# EAGLE board amp_soha_v4 (EAGLE 6.4)
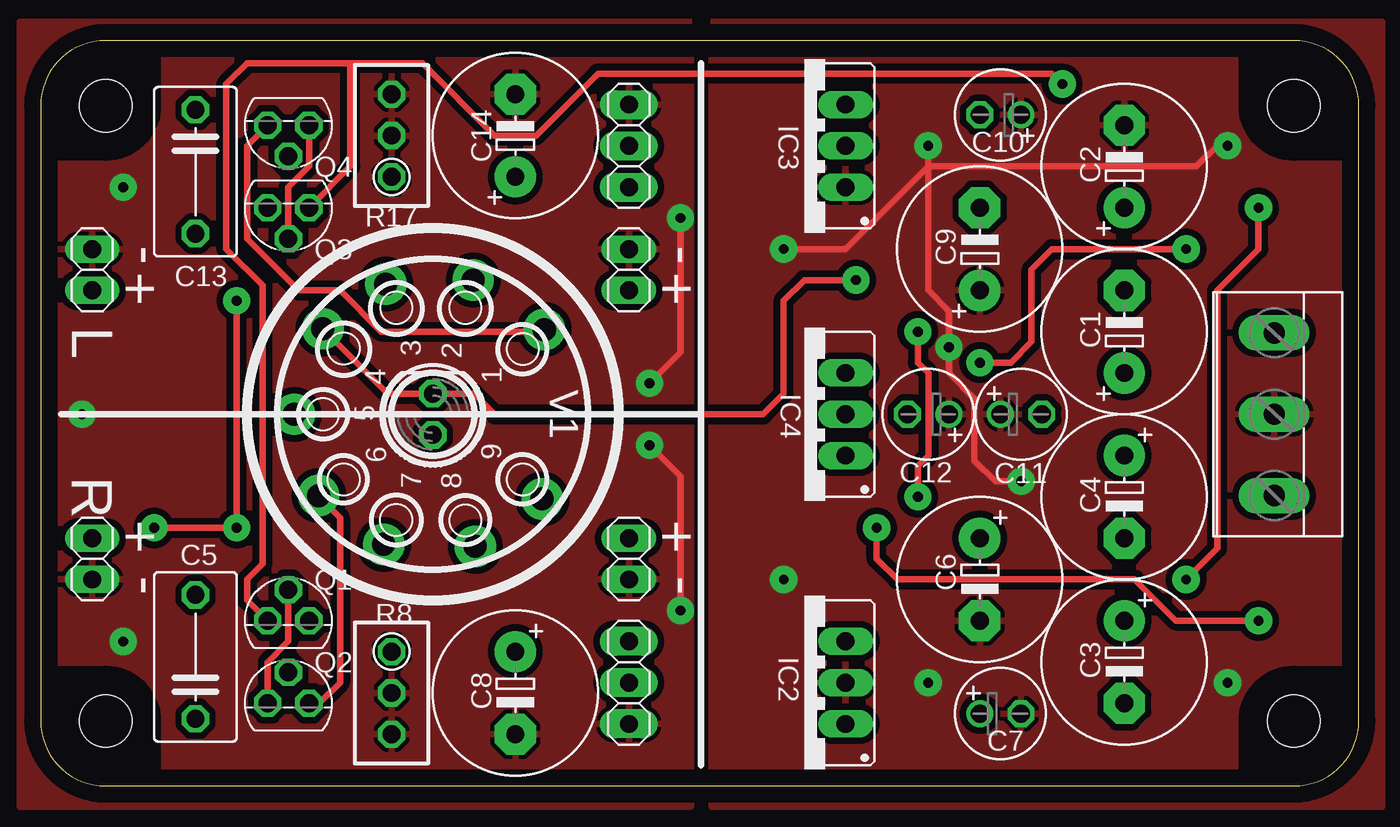
[diagram p0: board, top side]
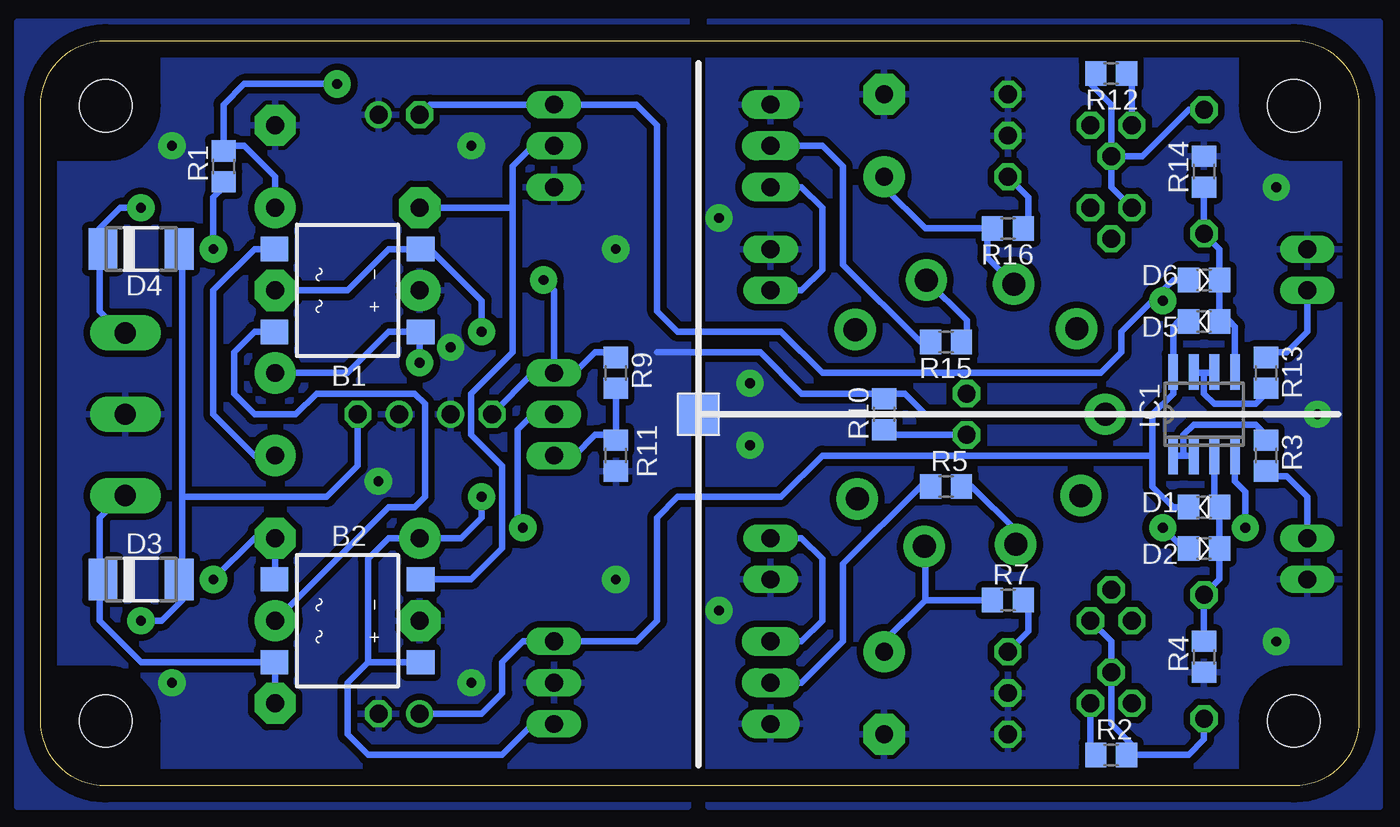
[diagram p1: board, bottom side, seen from below]

Size 81.11 x 45.84 mm. Coordinates in mm from the lower left corner, seen from the top.
Outline: 4,0 77.11,0 arc90 81.11,4 81.11,41.84 arc90 77.11,45.84 4,45.84 arc90 0,41.84 0,4 arc90 4,0
Copper layers (1*16): Top 0.035mm / dielectric 1.5mm / Bottom 0.035mm
Design rules "default": minimum track width 10mil, minimum drill 24mil, track to track 8mil, track to pad 8mil, pad to pad 8mil, via to via 8mil, smd to smd 8mil, copper to edge 40mil, drill to drill 8mil, minimum pad ring 10mil, minimum via ring 8mil, stop-mask expansion 4mil, vias tented up to drill 0mil, thermal gap 10mil
Holes 3.2 mm at 4,4 77.11,4 77.11,41.84 4,41.84
tKeepout: 8 lines
tRestrict: area 0,38.8 to 7,45.8; area 74.1,38.8 to 81.1,45.8; area 0,0 to 7,7; area 74.1,0 to 81.1,7
bRestrict: area 0,38.8 to 7,45.8; area 74.1,38.8 to 81.1,45.8; area 0,0 to 7,7; area 74.1,0 to 81.1,7
vRestrict: area 0,38.8 to 7,45.8; area 74.1,38.8 to 81.1,45.8; area 0,0 to 7,7; area 74.1,0 to 81.1,7

## Footprints (pad centres in the part's own frame; a part is rotated, then mirrored left to right if it is on the bottom)
DFS = smd 1.5 x 1.7: + -2.55,-4.5; - 2.55,-4.5; AC1 -2.55,4.5; AC2 2.55,4.5
E5-10,5 = drill 1.1 pad 2.54: + -2.54,0 | drill 1.1 pad 2.54 octagon: - 2.54,0
C075-052X106 = drill 1.1 pad 1.676 octagon: 1 -3.81,0; 2 3.81,0
E2,5-6 = drill 1.1: + -1.27,0 | drill 1.1 pad 1.6 octagon: - 1.27,0
D0805 = smd 1.3 x 1.5: A -0.95,0; K 0.95,0
DO-214AC = smd 1.778 x 2.54: A 2.342,0; C -2.342,0
SO08 = smd 0.6 x 2.2: 1 -1.905,-2.6; 2 -0.635,-2.6; 3 0.635,-2.6; 4 1.905,-2.6; 5 1.905,2.6; 6 0.635,2.6; 7 -0.635,2.6; 8 -1.905,2.6
78XXS = drill 1.1 pad 1.676 long: GND 0,-2.54; IN -2.54,-2.54; OUT 2.54,-2.54
79XXS = drill 1.1 pad 1.676 long: GND -2.54,-2.54; IN 0,-2.54; OUT 2.54,-2.54
337TS = drill 1.1 pad 1.676 long: 1 -2.54,-2.54; 2 0,-2.54; 3 2.54,-2.54
1X02 = drill 1.1 pad 1.676 long: 1 -1.27,0; 2 1.27,0
LED5MM = drill 1.1 pad 1.676 octagon: A -1.27,0; K 1.27,0
1X03 = drill 1.1 pad 1.778 long: 1 -2.54,0; 2 0,0; 3 2.54,0
TO92 = drill 1.1 pad 1.676 octagon: 1 1.27,0; 2 0,1.905; 3 -1.27,0
R0805 = smd 1.3 x 1.5: 1 -0.95,0; 2 0.95,0
SHORT = smd 1.27 x 2.54: 1 -0.635,0; 2 0.635,0
RTRIM3296W = drill 1.1 pad 1.676 octagon: 1 0,-2.54; 2 0,0; 3 0,2.54
NOVAL = drill 1.422 pad 2.54: 1 5.207,-6.858; 2 8.254,-2.484; 3 8.004,2.893; 4 5.258,6.77; 5 0,8.524; 6 -5.004,7.024; 7 -8.004,3.02; 8 -8.127,-2.611; 9 -5.207,-6.731
W237-103 = drill 1.3 pad 2.184 long: 1 -5,-1.29; 2 0,-1.29; 3 5,-1.29

## Placement (x,y rotation side)
B1  DF01S  [DFS]  62.23,30.48 90 bottom
B2  DF01S  [DFS]  62.23,10.16 90 bottom
C1  100uF/100V  [E5-10,5]  66.67,27.94 90 top
C2  100uF/100V  [E5-10,5]  66.67,38.1 90 top
C3  100uF/100V  [E5-10,5]  66.67,7.62 270 top
C4  100uF/100V  [E5-10,5]  66.67,17.78 270 top
C5  1uF/100V  [C075-052X106]  9.53,7.94 90 top
C6  470uF/35V  [E5-10,5]  57.78,12.7 270 top
C7  47uF/16V  [E2,5-6]  59.05,4.45 0 top
C8  1000uF/10V  [E5-10,5]  29.21,5.71 270 top
C9  470uF/35V  [E5-10,5]  57.78,33.02 90 top
C10  47uF/16V  [E2,5-6]  59.05,41.27 180 top
C11  47uF/35V  [E2,5-6]  60.33,22.86 0 top
C12  47uF/16V  [E2,5-6]  54.61,22.86 180 top
C13  1uF/100V  [C075-052X106]  9.53,37.78 270 top
C14  1000uF/10V  [E5-10,5]  29.21,40.01 90 top
D1  1N4148  [D0805]  9.53,17.14 180 bottom
D2  1N4148  [D0805]  9.53,14.61 0 bottom
D3  ES1  [DO-214AC]  74.93,12.7 0 bottom
D4  ES1  [DO-214AC]  74.93,33.02 0 bottom
D5  1N4148  [D0805]  9.53,28.57 180 bottom
D6  1N4148  [D0805]  9.53,31.11 0 bottom
IC1  NE5532  [SO08]  9.53,22.86 0 bottom
IC2  7812  [78XXS]  46.99,6.35 90 top
IC3  7912  [79XXS]  46.99,39.37 90 top
IC4  [337TS]  46.99,22.86 90 top
IN_L  [1X02]  36.2,31.75 90 top
IN_R  [1X02]  36.2,13.97 270 top
LED1  [LED5MM]  24.13,22.86 90 top
OUT_L  [1X02]  3.17,31.75 90 top
OUT_R  [1X02]  3.17,13.97 270 top
POT_L  100k  [1X03]  36.2,6.35 90 top
POT_R  100k  [1X03]  36.2,39.37 270 top
Q1  J113  [TO92]  15.24,10.16 0 top
Q2  J113  [TO92]  15.24,5.08 0 top
Q3  J113  [TO92]  15.24,35.56 180 top
Q4  J113  [TO92]  15.24,40.64 180 top
R1  2k2  [R0805]  69.85,38.1 270 bottom
R2  1k5  [R0805]  15.24,1.91 180 bottom
R3  150  [R0805]  5.71,20.32 270 bottom
R4  100k  [R0805]  9.53,7.94 270 bottom
R5  300  [R0805]  25.4,18.41 180 bottom
R6  SHORT  [SHORT]  40.64,22.86 0 bottom
R7  560  [R0805]  21.59,11.43 0 bottom
R8  2k  [RTRIM3296W]  21.59,5.71 180 top
R9  1k3  [R0805]  45.72,25.4 90 bottom
R10  1k  [R0805]  29.21,22.86 270 bottom
R11  11k  [R0805]  45.72,20.32 90 bottom
R12  1k5  [R0805]  15.24,43.81 0 bottom
R13  150  [R0805]  5.71,25.4 90 bottom
R14  100k  [R0805]  9.53,37.78 90 bottom
R15  300  [R0805]  25.4,27.3 180 bottom
R16  560  [R0805]  21.59,34.29 0 bottom
R17  2k  [RTRIM3296W]  21.59,40.01 0 top
V1  [NOVAL]  24.13,22.86 90 top
X1  [W237-103]  74.61,22.86 90 top

## Library data of the parts
B1 B2 C1-C14 D1-D6 IC1-IC4 IN_L IN_R LED1 OUT_L OUT_R POT_L POT_R Q1-Q4 R1-R17 V1 X1 = amp_soha

## Nets
+12V: C7.+ D1.K D5.K IC1.8 IC2.OUT
+24V: C2.+ Q1.3 Q3.3 R1.1
-12.6V: C12.- IC4.3 LED1.K R9.2 V1.4
-12V: C10.- D2.A D6.A IC1.4 IC3.OUT
AGND: C8.- C14.- IN_L.2 IN_R.2 OUT_L.2 OUT_R.2 POT_L.1 POT_R.1 R4.2 R6.2 R8.2 R8.3 R14.2 R17.2 R17.3
GND: C2.- C6.- C7.- C9.+ C10.+ C11.+ C12.+ IC2.GND IC3.GND R6.1 R10.1 R11.1 V1.5 X1.2
N$1: B2.AC1 C3.- D3.C X1.1
N$2: B2.AC2 C4.- D4.C X1.3
N$3: C11.- D3.A D4.A IC4.2
N$4: IC4.1 R9.1 R11.2
N$5: B2.- C9.- IC3.IN
N$6: B1.- B2.+ C1.- C6.+ IC2.IN
N$7: LED1.A R10.2
N$8: B1.AC1 C3.+
N$9: B1.AC2 C4.+
N$10: R15.1 V1.2
N$11: B1.+ C1.+ R1.2
N$12: IN_R.1 POT_L.3
N$13: POT_L.2 R5.2
N$14: R5.1 V1.7
N$15: C8.+ R7.1 V1.8
N$16: C5.1 Q1.1 Q2.2 R2.1
N$17: R7.2 R8.1
N$18: R16.2 R17.1
N$19: Q2.1 R2.2 V1.6
N$20: Q1.2 Q2.3
N$21: Q4.1 R12.2 V1.1
N$22: C5.2 D1.A D2.K IC1.3 R4.1
N$24: IC1.1 IC1.2 R3.1
N$25: OUT_R.1 R3.2
N$26: IN_L.1 POT_R.3
N$27: POT_R.2 R15.2
N$29: C14.+ R16.1 V1.3
N$32: C13.1 Q3.1 Q4.2 R12.1
N$33: Q3.2 Q4.3
N$34: C13.2 D5.A D6.K IC1.5 R14.1
N$35: IC1.6 IC1.7 R13.1
N$36: OUT_L.1 R13.2

## Tracks (layer width: path | path; a pad name or v marks a point on that pad's centre or on a via)
+12V
  Bottom 0.254: 10.67,28.45 D5.K | 10.67,17.27 D1.K
  Bottom 0.406: C7.+ 53.98,4.45 52.7,5.71 52.7,7.62 51.44,8.89 IC2.OUT 44.45,8.89 43.18,10.16 43.18,16.51 41.91,17.78 35.56,17.78 33.02,20.32 12.7,20.32 | D5.K 11.11,28.57 11.43,28.26 IC1.8 11.43,24.13 12.7,22.86 12.7,20.32 | 12.7,20.32 12.7,18.41 11.43,17.14 D1.K
+24V  (via drill 0.6 pad 1.68)
  Top 0.406: v62.87,43.18 62.23,43.81 34.29,43.81 30.48,40.01 27.94,40.01 23.5,44.45 19.05,44.45 | Q3.3 19.05,38.1 19.05,44.45 | 19.05,44.45 12.7,44.45 11.43,43.18 11.43,33.02 13.65,30.8 13.65,13.65 12.7,12.7 12.7,11.43 Q1.3
  Bottom 0.406: v62.87,43.18 68.58,43.18 69.85,41.91 69.85,39.37 | R1.1 69.85,39.37 | 69.85,39.37 68.58,39.37 66.67,37.47 C2.+
-12.6V  (via drill 0.6 pad 1.68)
  Top 0.406: V1.4 21.35,24.13 LED1.K 26.67,24.13 27.94,22.86 44.45,22.86 45.72,24.13 45.72,29.84 46.99,31.11 v50.16,31.11
  Bottom 0.406: IC4.3 48.26,25.4 46.99,26.67 46.04,26.67 R9.2 | C12.- 50.8,25.4 IC4.3 | v50.16,31.11 49.53,30.48 IC4.3
-12V  (via drill 0.6 pad 1.68)
  Top 0.406: v12.06,29.84 v12.06,15.88 v6.99,15.88
  Bottom 0.406: C10.- 57.15,41.91 IC3.OUT 44.45,41.91 43.18,40.64 43.18,29.21 41.91,27.94 35.56,27.94 33.02,25.4 15.88,25.4 14.61,26.67 14.61,27.94 12.06,30.48 | IC1.4 7.62,18.73 6.99,18.1 v6.99,15.88 | D2.A 10.79,14.61 v12.06,15.88 | D6.A 11.43,31.11 12.06,30.48 | 12.06,30.48 v12.06,29.84
AGND  (via drill 0.6 pad 1.68)
  Top 0.406: v39.37,10.79 39.37,19.05 v37.47,20.95 | v37.47,24.77 39.37,26.67 v39.37,34.92
  Bottom 0.254: 21.59,3.3 R8.3
  other vias: 2.54,22.86 5.08,8.89 5.08,36.83
  pour Bottom (isolate 0.406): -1.27,-1.27 -1.27,46.99 40.01,46.99 40.01,-1.27
  pour Top (isolate 0.406): -1.27,46.99 -1.27,-1.27 40.01,-1.27 40.01,46.99
GND  (via drill 0.6 pad 1.68)
  Top 0.406: v45.72,33.02 49.53,33.02 54.61,38.1 | 54.61,38.1 v54.61,39.37 | v73.03,39.37 72.39,39.37 71.12,38.1 54.61,38.1 | 54.61,38.1 54.61,30.48 55.88,29.21 v55.88,26.99 55.88,25.4 57.47,23.81 57.47,20 58.74,18.73 v60.33,18.73
  Bottom 0.406: V1.5 26.67,22.86 27.94,24.13 28.89,24.13 R10.1 29.21,24.13 34.29,24.13 36.83,26.67 43.18,26.67
  other vias: 45.72,12.7 73.03,6.35 54.61,6.35
  pour Bottom (isolate 0.406): 41.27,-1.27 82.55,-1.27 82.55,46.99 41.27,46.99
  pour Top (isolate 0.406): 41.27,-1.27 41.27,46.99 82.55,46.99 82.55,-1.27
N$1
  Bottom 0.305: 66.67,7.55 B2.AC1
  Bottom 0.406: C3.- 66.67,7.55 | B2.AC1 74.93,7.62 77.47,10.16 77.47,12.7 D3.C 77.47,12.9 77.47,16.51 76.12,17.86 X1.1
N$2  (via drill 0.6 pad 1.68)
  Top 0.406: v70.48,12.7 72.39,14.61 72.39,30.48 74.93,33.02 v74.93,35.56
  Bottom 0.254: 66.8,12.95 B2.AC2
  Bottom 0.406: X1.3 76.12,27.86 77.47,29.21 77.47,32.82 D4.C 77.47,33.22 77.47,34.29 76.2,35.56 v74.93,35.56 | 66.8,12.95 66.8,12.83 66.67,12.7 C4.- 67.94,15.24 v70.48,12.7
N$3  (via drill 0.6 pad 1.68)
  Top 0.406: v74.93,10.16 69.85,10.16 67.31,12.7 52.7,12.7 51.44,13.97 v51.44,15.88
  Bottom 0.254: 72.64,33.02 D4.A
  Bottom 0.406: 72.64,12.7 D3.A | D3.A 72.39,12.7 72.39,17.78 | 72.39,17.78 72.39,32.82 D4.A | v51.44,15.88 51.75,16.19 51.75,21.91 50.8,22.86 IC4.2 | C11.- 61.59,19.68 63.5,17.78 72.39,17.78 | v74.93,10.16 73.66,10.16 72.39,11.43 72.39,12.5 D3.A
N$4
  Bottom 0.406: R9.1 R11.2 46.04,21.59 46.99,21.59 48.26,20.32 IC4.1
N$5
  Bottom 0.254: 57.66,12.95 B2.-
  Bottom 0.406: 57.66,12.95 57.4,12.95 57.15,12.7 54.61,12.7 52.7,14.61 52.7,19.68 54.61,21.59 54.61,24.13 52.07,26.67 52.07,35.56 | 52.07,35.56 C9.- | IC3.IN 50.8,39.37 52.07,38.1 52.07,35.56
N$6  (via drill 0.6 pad 1.68)
  Top 0.406: v53.98,27.94 53.98,26.04 54.61,25.4 54.61,20.32 53.98,19.68 v53.98,17.78
  Bottom 0.254: 57.91,33.02 B1.- 57.66,33.02 | 57.66,7.37 B2.+
  Bottom 0.406: 60.96,7.62 60.96,13.97 59.69,15.24 C6.+ 55.24,15.24 53.98,16.51 v53.98,17.78 | 60.96,7.62 B2.+ | IC2.IN 50.8,3.81 52.7,1.91 60.96,1.91 62.23,3.17 62.23,6.35 60.96,7.62 | C1.- 62.23,30.48 59.69,33.02 B1.- 57.15,33.02 53.98,29.84 v53.98,27.94
N$7
  Bottom 0.406: LED1.A 28.89,21.59 R10.2
N$8
  Bottom 0.254: 66.8,27.69 B1.AC1
  Bottom 0.406: C3.+ 59.69,17.14 58.1,17.14 57.47,17.78 57.47,23.5 58.1,24.13 64.14,24.13 65.41,22.86 67.94,22.86 69.22,24.13 69.22,26.67 67.94,27.94 B1.AC1
N$9
  Bottom 0.254: 66.8,33.02 B1.AC2
  Bottom 0.406: 66.8,33.02 67.94,33.02 70.48,30.48 70.48,22.86 67.94,20.32 C4.+
N$10
  Bottom 0.406: R15.1 24.13,27.3 24.13,28.63 V1.2
N$11  (via drill 0.6 pad 1.68)
  Top 0.406: v70.48,33.02 62.23,33.02 60.96,31.75 60.96,27.3 59.69,26.04 v57.78,26.04
  Bottom 0.406: B1.+ 57.8,27.93 | C1.+ 62.23,25.4 59.7,27.93 57.8,27.93 | v70.48,33.02 70.48,36.2 69.85,36.83 R1.2 | 57.8,27.93 57.78,27.94 v57.78,26.04
N$12
  Bottom 0.406: IN_R.1 34.29,15.24 33.02,13.97 33.02,10.16 34.29,8.89 POT_L.3
N$13
  Bottom 0.406: R5.2 26.99,18.41 31.75,13.65 31.75,8.89 34.29,6.35 POT_L.2
N$14
  Bottom 0.406: R5.1 23.81,18.41 21.11,15.71 V1.7
N$15
  Bottom 0.406: R7.1 26.67,11.43 | 26.67,11.43 29.21,8.89 C8.+ | 26.67,11.43 26.67,14.66 V1.8
N$16
  Bottom 0.406: Q1.1 15.24,8.89 Q2.2 15.24,3.81 13.97,2.54 13.97,2.23 R2.1 10.48,1.91 9.53,2.86 C5.1
N$17
  Bottom 0.406: R7.2 20.32,11.43 20.32,9.53 R8.1
N$18
  Bottom 0.406: R16.2 20.32,34.29 20.32,36.2 R17.1
N$19
  Top 0.406: V1.6 17.11,17.82 18.41,16.51 18.41,6.35 17.14,5.08 Q2.1
  Bottom 0.406: R2.2 16.51,1.91 Q2.1
N$20
  Top 0.406: Q1.2 15.24,8.89 13.97,7.62 Q2.3
N$21
  Top 0.406: Q4.1 12.7,39.37 12.7,33.66 15.88,30.48 18.41,30.48 20.95,27.94 30.86,27.94 V1.1
  Bottom 0.406: Q4.1 13.97,43.49 R12.2
N$22
  Bottom 0.406: R4.1 C5.2 8.57,12.7 D2.K 8.57,17.46 8.89,17.78 | IC1.3 8.89,17.78 | 8.89,17.14 D1.A 8.89,17.46 8.89,17.78
N$24
  Bottom 0.406: IC1.2 10.16,20.32 10.79,20.32 | 10.79,20.32 11.37,20.32 | 11.37,20.32 IC1.1 11.43,20.32 11.37,20.32 | 10.79,20.32 10.79,21.59 10.16,22.23 6.35,22.23 5.71,21.59 R3.1
N$25
  Bottom 0.406: R3.2 5.71,19.05 4.45,19.05 3.17,17.78 OUT_R.1
N$26
  Bottom 0.406: POT_R.3 34.29,36.83 33.02,35.56 33.02,31.75 34.29,30.48 IN_L.1
N$27
  Bottom 0.406: POT_R.2 33.02,39.37 31.75,38.1 31.75,32.07 26.99,27.3 R15.2
N$29
  Bottom 0.406: C14.+ 29.21,36.83 26.67,34.29 22.86,34.29 | R16.1 22.86,34.29 | 22.86,34.29 22.86,32.49 V1.3
N$32
  Bottom 0.406: R12.1 16.51,43.81 16.51,43.18 15.24,41.91 Q4.2 | Q4.2 15.24,36.83 Q3.1 | C13.1 10.48,41.59 13.34,38.73 Q4.2
N$33
  Top 0.406: Q4.3 16.51,38.1 15.24,36.83 Q3.2
N$34
  Bottom 0.406: R14.1 C13.2 8.57,33.02 D6.K D5.A | 8.89,28.57 D5.A | IC1.5 7.62,28.26 7.94,28.57 D5.A | 8.89,28.89 D5.A
N$35
  Bottom 0.406: 9.53,25.4 10.1,25.4 IC1.7 | IC1.6 8.89,25.4 9.53,25.4 | 9.53,25.4 9.53,24.13 8.89,23.5 6.35,23.5 5.71,24.13 R13.1
N$36
  Bottom 0.406: OUT_L.1 3.17,27.94 4.45,26.67 5.08,26.67 5.4,26.35 R13.2

## Text on the board
tPlace: - | - | + | + | L | R | + | + | - | -
Measures: 90mm | 56mm | 4.0mm | D = 3.2mm | R = 4.0mm